# Altium PCB ADS1118_board.PcbDoc
Units mm, origin at the board's own origin, x right, y up, seen from the top; angles counter-clockwise.
Board outline 55.24 x 33.78 mm, 2 copper layers (Top Layer, Bottom Layer), stack 1.569 mm thick; 51 components, 33 nets, 144 pads, 152 vias.
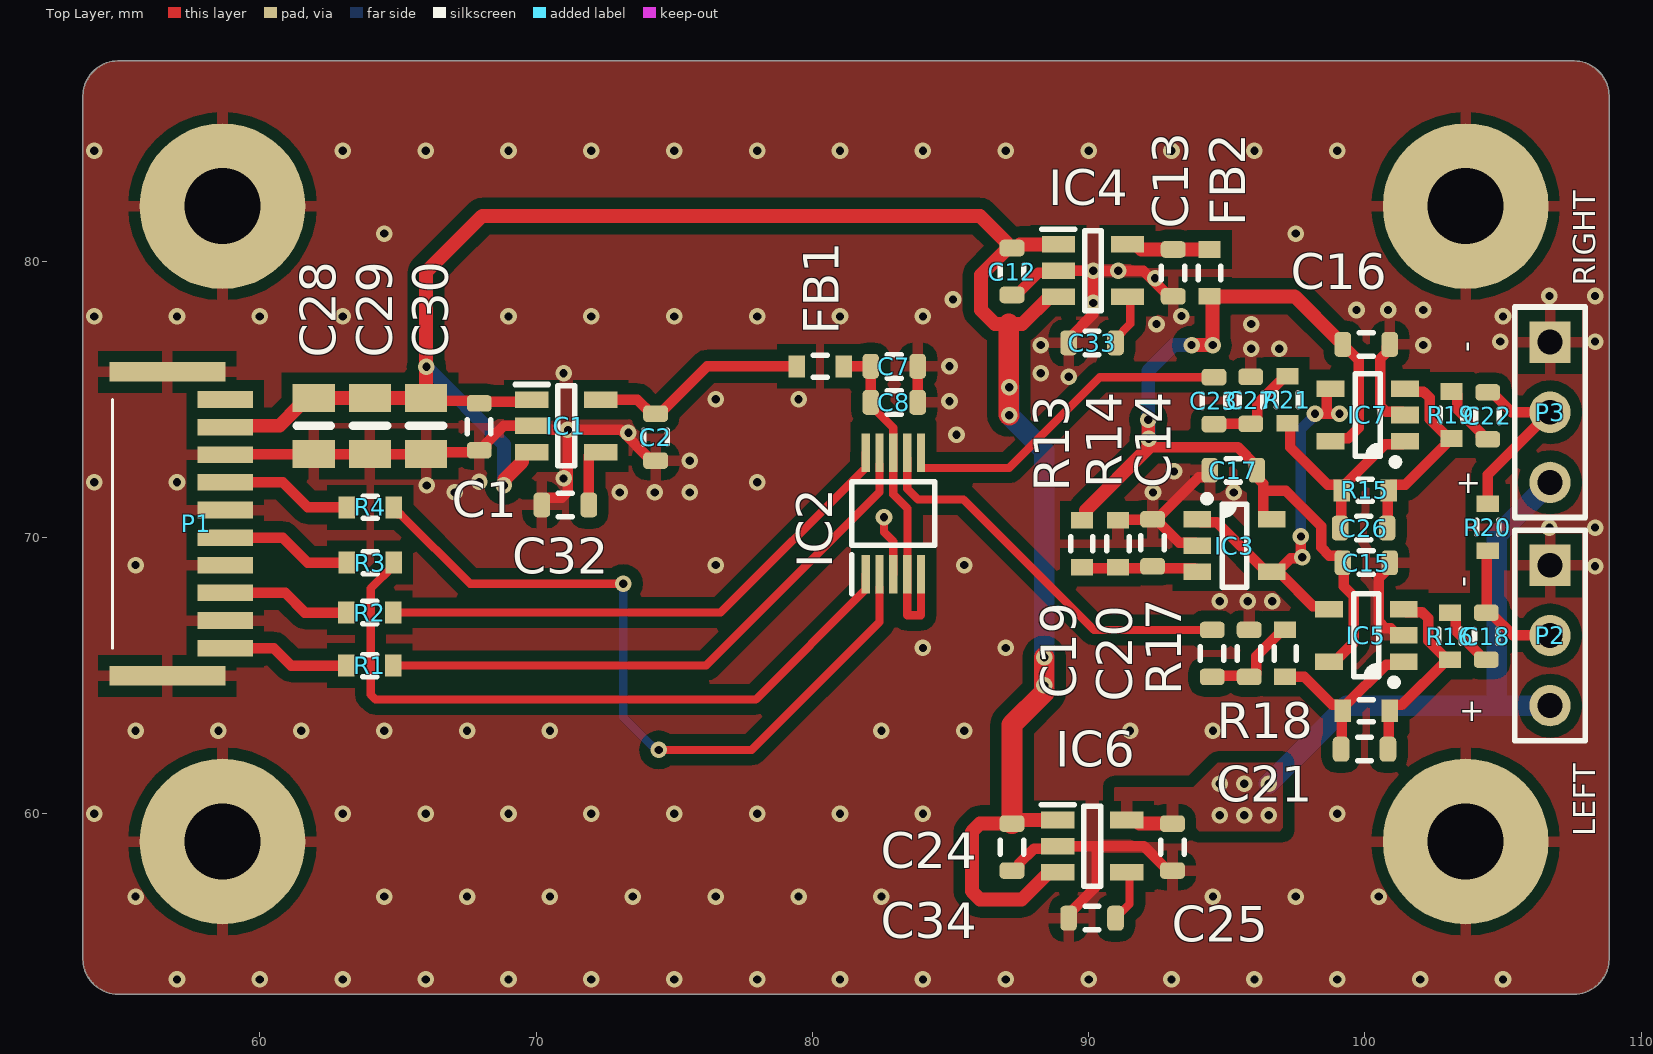
[diagram p0: Top Layer view]
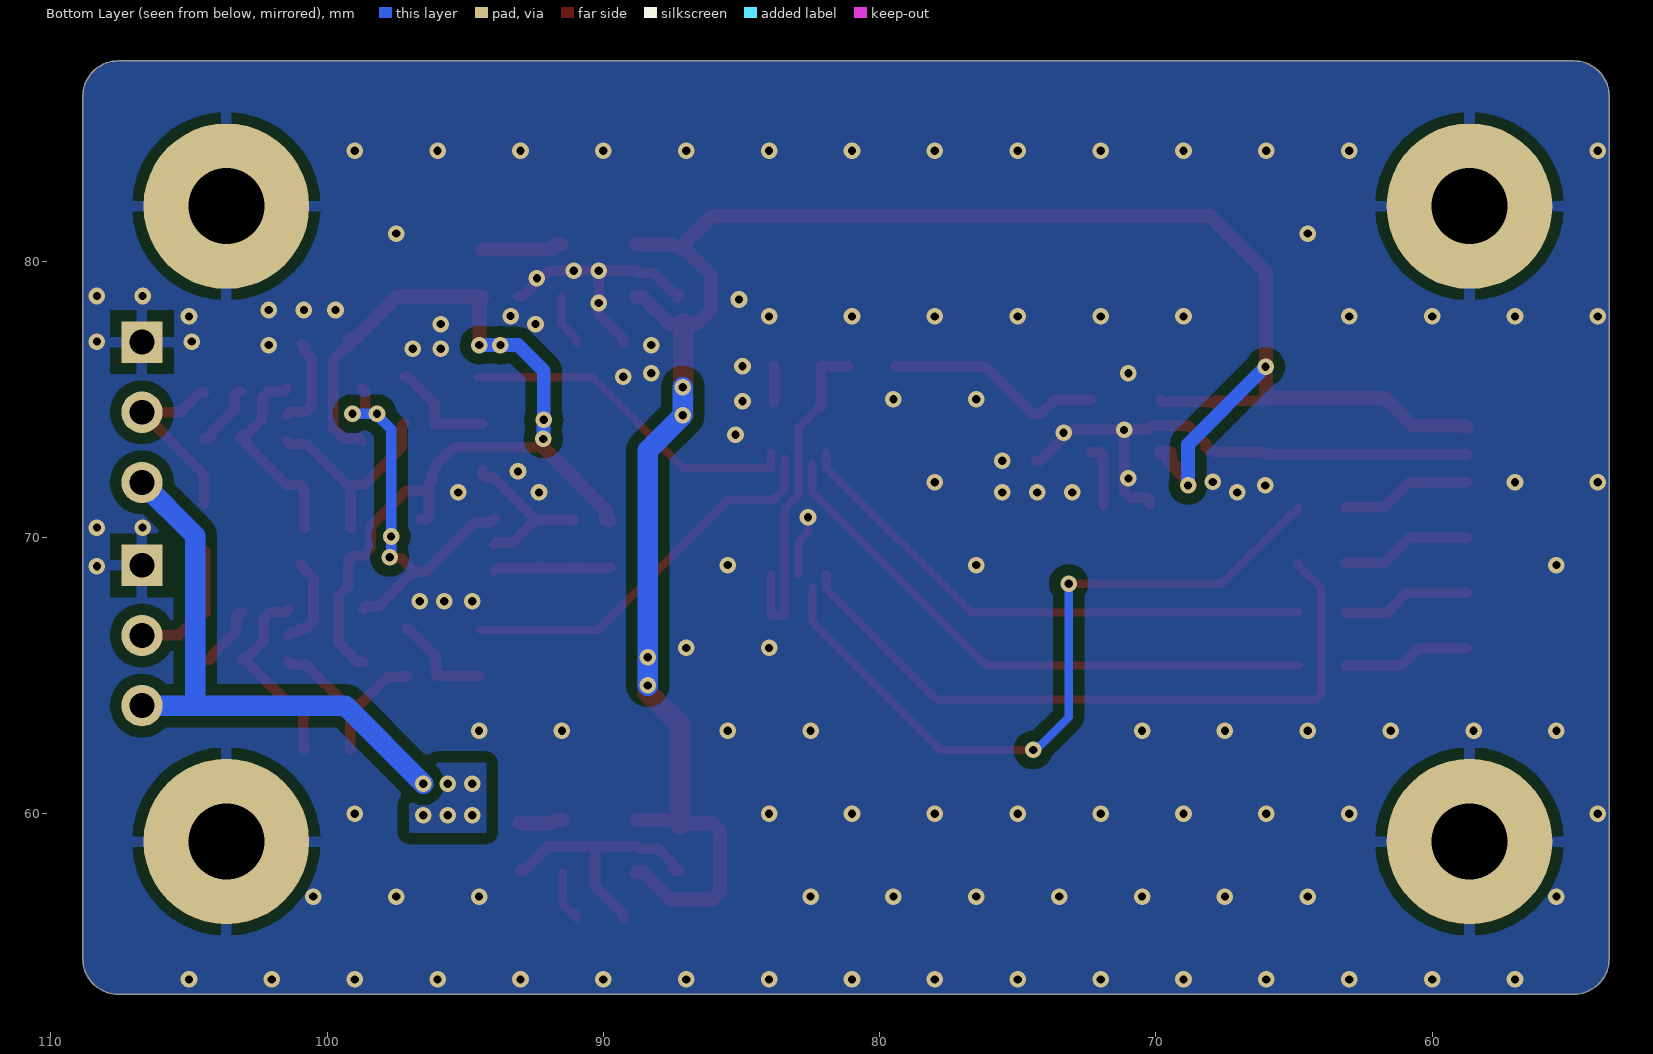
[diagram p1: Bottom Layer view, seen from below]
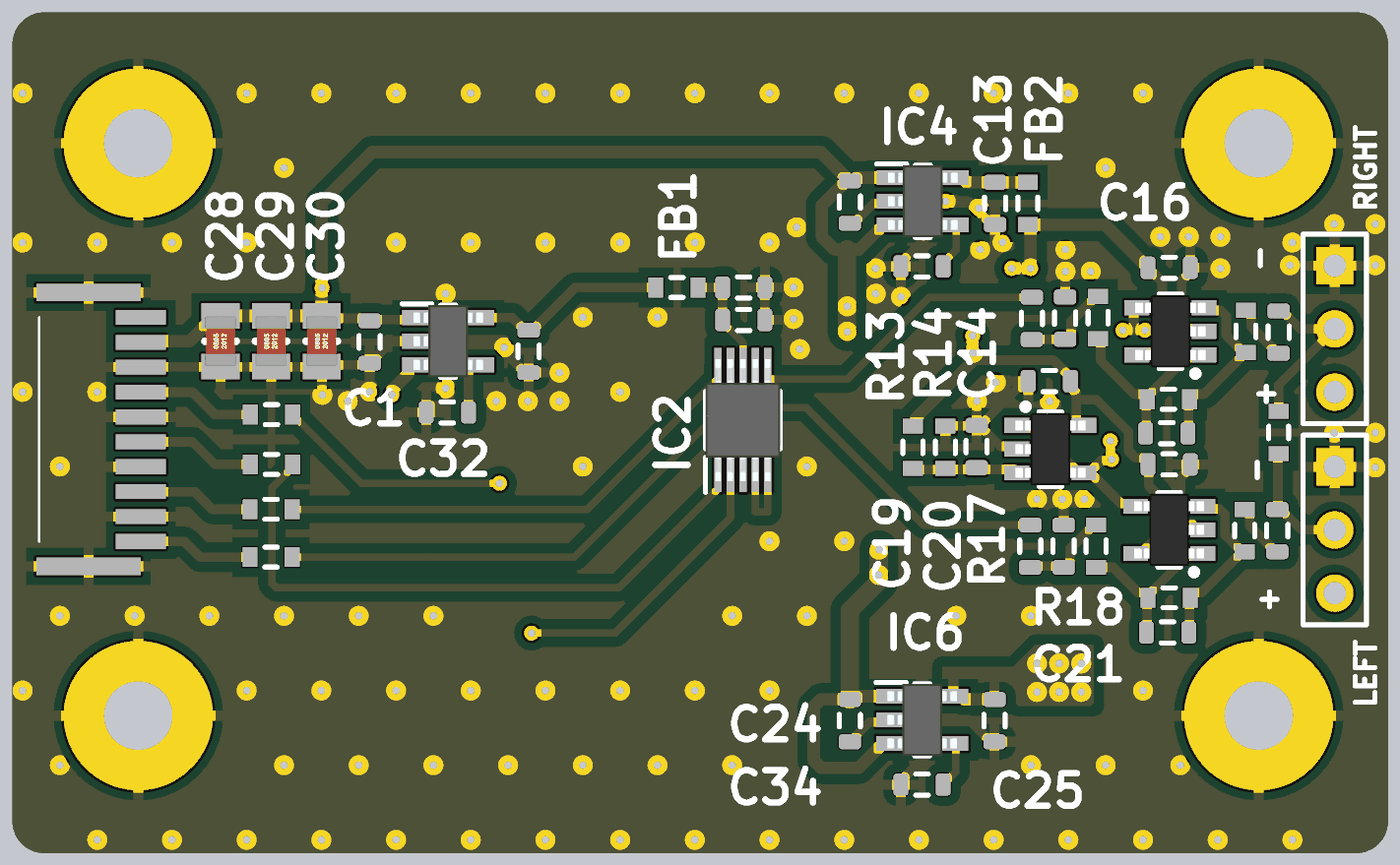
[diagram p2: 3D render of the assembled board from above, using the file's embedded part models]

## Layer stack, top to bottom
Top Solder: solder mask 0.0254, SM-001, Dk 4
Top Layer: signal copper 0.035
Dielectric 1: core 1.4986, Core-043, Dk 4.3
Bottom Layer: signal copper 0.035
Bottom Solder: solder mask 0.0254, SM-001, Dk 4

## Board outline
53.594,54.737 53.594,85.979 cw(c54.864,85.979) 54.864,87.249 107.569,87.249 cw(c107.569,85.979) 108.839,85.979 108.839,54.737 cw(c107.569,54.737) 107.569,53.467 54.864,53.467 cw(c54.864,54.737)

## Design rules (kind name [scope] priority, off if disabled: settings)
Clearance ClearancePol [InPoly] p1: gap=0.4 ignorepadtopadclearanceinfootprint=FALSE except(0: Arc-Hole Track-Hole SMDPad-Hole THPad-Hole Via-Hole Fill-Hole Poly-Hole Region-Hole Text-Hole)
Clearance Clearance_all [All] p2: gap=0.2 ignorepadtopadclearanceinfootprint=FALSE except(0: Arc-Hole Track-Hole SMDPad-Hole THPad-Hole Via-Hole Fill-Hole Poly-Hole Region-Hole Text-Hole)
ComponentClearance "Clearance Jumper" [(HasFootprint('Jumper NC') OR HasFootprint('Jumper NO'))] p1: gap=-0.5 collisioncheckmode=3 verticalgap=0.254 showdistances=FALSE
ComponentClearance "Clearance Coral" [(HasFootprint('Jumper NC') OR HasFootprint('Jumper NO'))] p2: gap=-0.5 collisioncheckmode=3 verticalgap=0.254 showdistances=FALSE
ComponentClearance "Clearance TEST" [(HasFootprint('test point 1mm'))] p3: gap=-0.5 collisioncheckmode=3 verticalgap=-0.5 showdistances=FALSE
ComponentClearance "Clearance PLS" [HasFootprint('PLS-1')] p4: gap=0 collisioncheckmode=3 verticalgap=0 showdistances=FALSE
ComponentClearance "Clearance PLS to PLS" [(HasFootprint('PLS-1 3D')) vs (HasFootprint('PLS-1 3D'))] p5: gap=-0.2 collisioncheckmode=3 verticalgap=0 showdistances=FALSE
ComponentClearance "Clearance PLS-4 to PLS-4" [(HasFootprint('PLS-4 3D')) vs (HasFootprint('PLS-4 3D'))] p6: gap=-0.2 collisioncheckmode=3 verticalgap=0 showdistances=FALSE
ComponentClearance [All] p7: gap=0.254 collisioncheckmode=3 verticalgap=0.254 showdistances=FALSE
DiffPairsRouting "DiffPairs USB" [(InNetClass('USB_HOST_1') OR InNetClass('USB_HOST_2') OR InNetClass('USB_HOST_3') OR InNetClass('USB_HOST_4'))] p1: maxlimit=0.2 minlimit=0.2 mostfreqgap=0.2 toplayer_minwidth=0.2 toplayer_maxwidth=0.2 toplayer_prefwidth=0.2 bottomlayer_minwidth=0.2 bottomlayer_maxwidth=0.2 bottomlayer_prefwidth=0.2 maxuncoupledlength=12.7
DiffPairsRouting "DiffPairs USB_CTRL" [InNetClass('USB_CTRL')] p2: maxlimit=0.2 minlimit=0.2 mostfreqgap=0.2 toplayer_minwidth=0.2 toplayer_maxwidth=0.2 toplayer_prefwidth=0.2 bottomlayer_minwidth=0.2 bottomlayer_maxwidth=0.2 bottomlayer_prefwidth=0.2 maxuncoupledlength=3
DiffPairsRouting "DiffPairs USB_CTRL_2" [InNetClass('USB_CTRL_2')] p3: maxlimit=0.2 minlimit=0.2 mostfreqgap=0.2 toplayer_minwidth=0.2 toplayer_maxwidth=0.2 toplayer_prefwidth=0.2 bottomlayer_minwidth=0.2 bottomlayer_maxwidth=0.2 bottomlayer_prefwidth=0.2 maxuncoupledlength=3
DiffPairsRouting [InNetClass('ETHERNET')] p4: maxlimit=0.2 minlimit=0.2 mostfreqgap=0.2 toplayer_minwidth=0.2 toplayer_maxwidth=0.2 toplayer_prefwidth=0.2 bottomlayer_minwidth=0.2 bottomlayer_maxwidth=0.2 bottomlayer_prefwidth=0.2 maxuncoupledlength=12.7
HoleSize [All] p1: absolutevalues=TRUE maxlimit=3.5 minlimit=0.025 maxpercent=80.000 minpercent=20.000
MatchedLengths USB2_RX [InNetClass('USB_CTRL_2')] p1: tolerance=0.2 checknetsindiffpair=TRUE checkdiffpairvsdiffpair=FALSE checkxsignals=FALSE checkothers=FALSE
MinimumSolderMaskSliver [All] p1: minsoldermaskwidth=0.01
PolygonConnect "Polygon to TEST PAD" [(HasFootprint('test point 1mm'))] p1: connectstyle=Direct reliefconductorwidth=0.254 reliefentries=4 polygonreliefangle="90 Angle" airgapwidth=0.254
PolygonConnect "Polygon to Battery" [HasFootprint('KEYS1042')] p2: connectstyle=Relief reliefconductorwidth=1 reliefentries=4 polygonreliefangle="90 Angle" airgapwidth=0.5
PolygonConnect "Polygon to VIA" [IsVia] p3: connectstyle=Direct reliefconductorwidth=0.254 reliefentries=4 polygonreliefangle="90 Angle" airgapwidth=0.254
PolygonConnect [All] p4: connectstyle=Relief reliefconductorwidth=0.4 reliefentries=4 polygonreliefangle="90 Angle" airgapwidth=0.4
RoutingVias [All] p1: holewidth=0.3 width=0.6 viastyle="Through Hole" minholewidth=0.3 minwidth=0.6 maxholewidth=0.3 maxwidth=0.6
SilkToSilkClearance [All] p1: silktosilkclearance=0.01
SilkToSolderMaskClearance [IsPad] p1: minsilkscreentomaskgap=0.01 clearancetoexposedcopper=TRUE
SolderMaskExpansion "SolderMask for VIA" [IsVia] p1: expansion=-0.5 istentingtop=FALSE
SolderMaskExpansion [All] p2: expansion=0.102 istentingtop=FALSE
ViasUnderSMD [All] p1: allowed=TRUE
Width "Width HSPEED ETH" [(InNetClass('ETH_RXD') OR InNetClass('ETH_TXD'))] p1: maxlimit=0.2 minlimit=0.2 preferedwidth=0.2
Width [All] p2: maxlimit=2 minlimit=0.2 preferedwidth=0.2
24 further rules are at their usual default settings.

## Classes and differential pairs
component class Analog: C12 C13 C14 C15 C16 C17 C18 C19 C20 C21 C22 C23 C24 C25 C26 C27 C33 C34 FB2 IC3 IC4 IC5 IC6 IC7 P2 P3 R13 R14 R15 R16 R17 R18 R19 R20 R21
component class ADC: C1 C2 C7 C8 C28 C29 C30 C32 FB1 IC1 IC2 P1 R1 R2 R3 R4

## Components (designator, comment, footprint, x,y, rotation, side; value= is the part's Value field where it differs from the comment)
C1 "10µF" "CAP 0603_1608"#1 67.909,74.036 r90 top
C2 "10µF" "CAP 0603_1608"#1 74.295,73.66 r90 top
C7 "1µF" "CAP 0603_1608"#1 82.931,76.164 r180 top
C8 "0.1µF" "CAP 0603_1608"#1 82.931,74.859 r180 top
C12 "10µF" "CAP 0603_1608"#1 87.196,79.658 r90 top
C13 "10µF" "CAP 0603_1608"#2 93.029,79.606 r90 top
C14 "0.1µF" "CAP 0603_1608"#2 92.346,69.773 r270 top
C15 "0.1µF" "CAP 0603_1608"#1 100.018,69.055 r180 top
C16 "0.1µF" "CAP 0603_1608"#1 100.018,76.956 r180 top
C17 "0.1µF" "CAP 0603_1608"#2 95.269,72.462 r0 top
C18 "10µF" "CAP 0603_1608"#1 104.362,66.457 r90 top
C19 "10 µF" "CAP 0603_1608"#1 94.442,65.833 r90 top
C20 "0.1µF" "CAP 0603_1608"#1 95.841,65.769 r270 top
C21 "10nF" "CAP 0603_1608"#1 100.018,62.365 r0 top
C22 "10µF" "CAP 0603_1608"#1 104.416,74.432 r90 top
C23 "10 µF" "CAP 0603_1608"#1 94.506,74.984 r90 top
C24 "10µF" "CAP 0603_1608"#1 87.196,58.823 r90 top
C25 "10µF" "CAP 0603_1608"#1 93.005,58.823 r90 top
C26 "10nF" "CAP 0603_1608"#1 99.986,70.368 r0 top
C27 "0.1µF" "CAP 0603_1608"#2 95.9,74.931 r270 top
C28 "10uF" SMD-0805C 61.95,74.036 r0 top
C29 "10uF" SMD-0805C 63.98,74.036 r0 top
C30 "10uF" SMD-0805C 66.016,74.036 r0 top
C32 "100nF" "CAP 0603_1608"#1 71.09,71.207 r0 top
C33 "100nF" "CAP 0603_1608"#2 90.155,77.071 r0 top
C34 "100nF" "CAP 0603_1608"#1 90.155,56.249 r0 top
FB1 "=Value" "FER 0603_1608"#1 80.28,76.194 r0 top
FB2 "=Value" "FER 0603_1608"#2 94.374,79.574 r90 top
IC1 "TPS76350DBVR" SOT95P280X145-5N 71.09,74.036 r0 top
IC2 "ADS1118IDGSR" SOP50P490X110-10N 82.931,70.866 r90 top
IC3 "AD8541ARTZ-REEL7" "ANALOG SOT-23-5 RJ-5" 95.281,69.702 r0 top
IC4 "TPS76350DBVR" SOT95P280X145-5N 90.155,79.658 r0 top
IC5 "AD8541ARTZ-REEL7" "ANALOG SOT-23-5 RJ-5" 100.05,66.457 r180 top
IC6 "TPS76350DBVR" SOT95P280X145-5N 90.131,58.823 r0 top
IC7 "AD8541ARTZ-REEL7" "ANALOG SOT-23-5 RJ-5" 100.103,74.432 r180 top
P1 "SFW10R-1STE9LF" SFW10R1STE9LF 57.147,70.492 r270 top
P2 "Header 3" HDR1X3 106.702,68.991 r270 top
P3 "Header 3" HDR1X3 106.702,77.071 r270 top
R1 "0 Ohms" "RES 0603_1608"#1 63.98,65.361 r0 top
R2 "0 Ohms" "RES 0603_1608"#1 63.98,67.282 r0 top
R3 "0 Ohms" "RES 0603_1608"#1 63.996,69.086 r0 top
R4 "0 Ohms" "RES 0603_1608"#1 63.996,71.086 r0 top
R13 "10k Ohms" "RES 0603_1608"#1 89.757,69.773 r90 top
R14 "10k Ohms" "RES 0603_1608"#2 91.062,69.773 r270 top
R15 "100k Ohms" "RES 0603_1608"#1 100.018,71.703 r0 top
R16 "100 Ohms" "RES 0603_1608"#1 103.081,66.425 r90 top
R17 "100 Ohms" "RES 0603_1608"#1 97.115,65.801 r270 top
R18 "100k Ohms" "RES 0603_1608"#1 100.05,63.728 r0 top
R19 "100 Ohms" "RES 0603_1608"#1 103.134,74.432 r90 top
R20 "0 Ohms" "RES 0603_1608"#1 104.446,70.368 r90 top
R21 "100 Ohms" "RES 0603_1608"#1 97.195,74.984 r270 top

## Footprints (in the part's own frame and the unit in brackets; to place one, negate y for a bottom-side part, rotate by r counter-clockwise, add the part's x,y. Pads: shape width x height; smd on the part's side, far side on the other; paste and mask are expansions set on the pad)
"ANALOG SOT-23-5 RJ-5" [mm] "SOT23, 5-Leads, Body 2.90x2.80mm, Pitch 0.95mm, IPC Medium Density"
  rect 1x0.6 smd: 1(-1.35,0.95) 2(-1.35,0) 3(-1.35,-0.95) 4(1.35,-0.95) 5(1.35,0.95)
  silkscreen extent -1.12,-1.5 0.45,1.82, body extent -1.41,-1.45 1.41,1.45, height 1.5
"CAP 0603_1608"#1 [mm] "Chip Capacitor, 2-Leads, Body 1.60x0.80mm, IPC Medium Density"
  rrect50% 0.6x0.9 smd mask+0.05: 1(-0.882,-0.03) 2(0.818,-0.03)
  silkscreen extent -0.28,-0.46 0.22,0.39, body extent -0.83,-0.43 0.77,0.37, height 0.8
"CAP 0603_1608"#2 [mm] "Chip Capacitor, 2-Leads, Body 1.60x0.80mm, IPC Medium Density"
  rrect50% 0.6x0.9 smd: 1(-0.882,-0.03) 2(0.818,-0.03)
  silkscreen extent -0.28,-0.46 0.22,0.39, body extent -0.83,-0.43 0.77,0.37, height 0.8
"FER 0603_1608"#1 [mm] "Chip Ferrite, 2-Leads, Body 1.60x0.80mm, IPC Medium Density"
  rect 0.6x0.8 smd mask+0.05: 1(-0.85,0) 2(0.85,0)
  silkscreen extent -0.25,-0.4 0.25,0.4, body extent -0.77,-0.42 0.78,0.43, height 0.45
"FER 0603_1608"#2 [mm] "Chip Ferrite, 2-Leads, Body 1.60x0.80mm, IPC Medium Density"
  rect 0.6x0.8 smd: 1(-0.85,0) 2(0.85,0)
  silkscreen extent -0.25,-0.4 0.25,0.4, body extent -0.77,-0.42 0.78,0.43, height 0.45
HDR1X3 [mm] "Connector; Header; 3 Position"
  rect 1.5x1.5 hole 0.9: 1(0,0)
  round 1.5 hole 0.9: 2(2.54,0) 3(5.08,0)
  silkscreen extent -1.27,-1.27 6.35,1.27
"RES 0603_1608"#1 [mm] "Chip Resistor, 2-Leads, Body 1.60x0.80mm, IPC Medium Density"
  rect 0.6x0.8 smd mask+0.05: 1(-0.85,0) 2(0.85,0)
  silkscreen extent -0.25,-0.4 0.25,0.4, body extent -0.77,-0.42 0.78,0.43, height 0.45
"RES 0603_1608"#2 [mm] "Chip Resistor, 2-Leads, Body 1.60x0.80mm, IPC Medium Density"
  rect 0.6x0.8 smd: 1(-0.85,0) 2(0.85,0)
  silkscreen extent -0.25,-0.4 0.25,0.4, body extent -0.77,-0.42 0.78,0.43, height 0.45
SFW10R1STE9LF [mm]
  rect 0.6x2 smd: 1(-4.5,1.6) 2(-3.5,1.6) 3(-2.5,1.6) 4(-1.5,1.6) 5(-0.5,1.6) 6(0.5,1.6) 7(1.5,1.6) 8(2.5,1.6) 9(3.5,1.6) 10(4.5,1.6)
  rect 0.7x4.2 smd: MP1(-5.5,-0.5) MP2(5.5,-0.5)
  silkscreen extent -4.5,-2.48 4.5,-2.48
SMD-0805C [mil]
  rect 60x40 smd: 1(0,40) 2(0,-40)
  silkscreen extent -25,0 25,0, body extent -25,-39 25,39, height 35
SOP50P490X110-10N [mm]
  rect 1.4x0.3 smd: 1(-2.2,1) 2(-2.2,0.5) 3(-2.2,0) 4(-2.2,-0.5) 5(-2.2,-1) 6(2.2,-1) 7(2.2,-0.5) 8(2.2,0) 9(2.2,0.5) 10(2.2,1)
  silkscreen extent -2.9,-1.5 1.15,1.5, body extent -2.45,-1.5 2.45,1.5, height 1.1
SOT95P280X145-5N [mm]
  rect 1.2x0.6 smd: 1(-1.25,0.95) 2(-1.25,0) 3(-1.25,-0.95) 4(1.25,-0.95) 5(1.25,0.95)
  silkscreen extent -1.85,-1.45 0.3,1.5, body extent -1.4,-1.45 1.4,1.45, height 1.45

## Part data
C1 C2 C7 C8 C12 C13 C14 C15 C16 C17 C18 C19 C20 C21 C22 C23 C24 C25 C26 C27 C32 C33 C34: library part 100X14W104MV4T, "CAP CER 0.1UF 10V X7R 0603", Part Number=100X14W104MV4T
C28 C29 C30: library part GRJ21BR71A106KE01L, "CAP CER 10UF 10V X7R 0805", Digi-Key Part Number=490-10919-1-ND, Manufacturer="Murata Electronics North America", Operating Temperature="-55°C ~ 125°C", Package / Case="0805 (2012 Metric)", Ratings=-, Temperature Coefficient=X7R, Tolerance=±10%, Voltage=10V, @ qty=0, Applications="Boardflex Sensitive", Datasheets=http://www.murata.com/~/media/webrenewal/support/library/catalog/products/capacitor/mlcc/c02e.pdf, Factory Stock=0, Features="Soft Termination", Height - Seated (Max)=-, Image=//media.digikey.com/Renders/Murata%20Renders/0805%20(2012%20Metric)%20.85mm.jpg, Lead Spacing=-, Lead Style=-, Minimum Quantity=1, Mounting Type="Surface Mount, MLCC", Packaging="Cut Tape (CT)", Part Number=GRJ21BR71A106KE01L, Part Status=Active, Quantity Available=6658, Series=GRJ, Size / Dimension="0.079\" L x 0.049\" W (2.00mm x 1.25mm)", Thickness (Max)="0.057\" (1.45mm)", Unit Price (USD)=0,69
FB1 FB2: library part 2506031217H0, "FERRITE BEAD 0603 1LN", Part Number=2506031217H0
IC1 IC4 IC6: "Integrated Circuit", Manufacturer_Name="Texas Instruments", Mouser Part Number=595-TPS76350DBVR, Arrow Part Number=TPS76350DBVR, Arrow Price/Stock=https://www.arrow.com/en/products/tps76350dbvr/texas-instruments, Datasheet Link=https://www.ti.com/lit/gpn/TPS763, Height=1.45mm, Manufacturer_Part_Number=TPS76350DBVR, Mouser Price/Stock=https://www.mouser.co.uk/ProductDetail/Texas-Instruments/TPS76350DBVR?qs=8yeEWhuAOtMYKUfRRdAKSw%3D%3D
IC2: "Integrated Circuit", Manufacturer_Name="Texas Instruments", Mouser Part Number=595-ADS1118IDGSR, Arrow Part Number=ADS1118IDGSR, Arrow Price/Stock=https://www.arrow.com/en/products/ads1118idgsr/texas-instruments?region=nac, Datasheet Link=http://www.ti.com/lit/gpn/ads1118, Height=1.1mm, Manufacturer_Part_Number=ADS1118IDGSR, Mouser Price/Stock=https://www.mouser.co.uk/ProductDetail/Texas-Instruments/ADS1118IDGSR?qs=g5raLcSarOb4n6jVZI8bUw%3D%3D
IC3 IC5 IC7: "IC OPAMP GP 1 CIRCUIT SOT23-5", Current - Input Bias=4pA, Current - Output / Channel=30mA, Current - Supply=45µA, Device Package="SC-74A, SOT-753", Manufacturer="Analog Devices Inc.", Operating Temperature="-40°C ~ 125°C", Supplier Device Package=SOT-23-5, Supplier Part Number 1=AD8541ARTZ-REEL7CT-ND, Voltage - Input Offset=1mV, Voltage - Supply, Single/Dual (±)="2.7V ~ 5.5V", Amplifier Type="General Purpose", ComponentLink1Description=Datasheet, ComponentLink1URL=https://www.analog.com/media/en/technical-documentation/data-sheets/AD8541_8542_8544.pdf, ComponentLink2Description="DigiKey Link", ComponentLink2URL=http://digikey.com/product-detail/en/analog-devices-inc/AD8541ARTZ-REEL7/AD8541ARTZ-REEL7CT-ND/813416, Gain Bandwidth Product=1MHz, LastUpdated="08.01.2020 23:39:15", Lifecycle Status=Active, Minimum Order=1, Mounting Type="Surface Mount", Number of Circuits=1, Output Type=Rail-to-Rail, Package / Case="SC-74A, SOT-753", Packaging=ReReel, Part Number=AD8541ARTZ-REEL7, Part Status=Active, PartId=9, Price=0.00, Series=-, Slew Rate=0.92V/µs, Supplier 1=DigiKey
P1: "Connector", Manufacturer_Name=Amphenol, Mouser Part Number=649-SFW10R-1STE9LF, Datasheet Link=http://uk.rs-online.com/web/p/products/1708742, Height=2.7mm, Manufacturer_Part_Number=SFW10R-1STE9LF, Mouser Price/Stock=https://www.mouser.co.uk/ProductDetail/Amphenol-FCI/SFW10R-1STE9LF/?qs=0%2FIPJkn5eAy46aTtkIWKXg%3D%3D
P2 P3: "Header, 3-Pin", LatestRevisionDate=17-Jul-2002, LatestRevisionNote="Re-released for DXP Platform.", Publisher="Altium Limited"
R1 R2 R3 R4 R13 R14 R15 R16 R17 R18 R19 R20 R21: library part RNCS0603BKE100R, "RES 100 OHM 0.1% 1/16W 0603", Part Number=RNCS0603BKE100R

## Free pads (board coordinates)
  round 6 hole 2.75: ""(58.647,58.991) ""(58.647,81.991) ""(103.647,58.991) ""(103.647,81.991)

## Via types
v1: diameter 0.6, hole 0.3, Top Layer to Bottom Layer, 152 vias

## Nets (pads, with @x,y where several pads share a name; then routed paths per layer and width w, separated by ;. In a path a pad name is that pad's centre, name@x,y a point inside that pad or via, vN(x,y) a via of type N, cw(c..) or ccw(c..) an arc to the next point about the centre after c; other vN are vias at no path point)
+3V3: C2.2 FB1.1 IC1.5 | length 8
  Top Layer w0.381: IC1.5 73.667,74.986 74.175,74.478 C2.2 74.475,74.478 76.191,76.194 FB1.1
+3V3_EXT: P1.1
+3VA: C13.2 FB2.2 IC4.5 | length 2.9
  Top Layer w0.5: IC4.5@91.505,80.608 91.73,80.608 91.915,80.424 C13.2 FB2.2
+AVCC: C15.2 C16.2 C17.2 FB2.1 IC3.5 IC5.5 IC7.5 R13.2 | length 37.8
  Top Layer w0.381: 92.156,73.233 92.195,73.272 95.396,73.272 96.087,72.581 C17.2 96.196,72.322 96.196,72.073 96.325,71.945 96.325,71.683 ; IC3.5 96.434,70.652 96.325,70.762 96.325,71.683 ; IC5.5 98.9,65.507 99.59,66.197 99.59,67.869 99.232,68.227 99.232,69.053 C15.2 99.2,69.235 99.09,69.344 98.71,69.344 98.413,69.641 98.413,70.407 97.137,71.683 96.325,71.683 ; IC7.5 98.863,73.592 99.4,73.592 99.772,73.964 99.772,76.414 C16.2
  Top Layer w0.5: R13.2 89.857,70.623 89.907,70.673 89.907,70.984 92.156,73.233 92.156,73.566 v1(92.156,74.261) ; v1(93.726,76.962) v1(94.488,76.962) 94.488,78.609 FB2.1 97.462,78.724 99,77.186 99.15,77.186 99.2,77.136 C16.2
  Bottom Layer w0.5: v1(92.172,73.566) 92.164,73.574 92.164,74.253 v1(92.156,74.261) 92.156,76.027 93.091,76.962 v1(93.726,76.962) v1(94.488,76.962)
+V_EXT: C1.2 C12.2 C24.2 C28.1 C29.1 C30.1 IC1.1 IC1.3 IC4.1 IC4.3 IC6.1 IC6.3 P1.2 | length 83.4
  Top Layer w0.381: C30.1 66.115,74.953 67.84,74.953 C1.2 67.991,74.906 69.76,74.906 IC1.1
  Top Layer w0.5: P1.2 58.797,74.042 60.707,74.042 61.438,74.773 61.438,74.794 61.696,75.052 C29.1 C30.1 v1@66.016,76.178 ; v1(66.027,76.178) v1@66.016,76.178 ; v1(68.834,71.882) 68.853,71.901 68.853,72.099 69.49,72.736 69.49,73.036 69.54,73.086 IC1.3 ; C12.2 C12.2@87.076,80.476 ; C12.2@87.509,80.608 IC4.1@88.805,80.608 ; IC6.3@88.781,57.873 88.556,57.873 87.579,56.896 86.069,56.896 85.776,57.189 85.776,59.348 86.069,59.641 C24.2 87.376,59.641 87.509,59.773 IC6.1@88.781,59.773 ; IC4.3@88.805,78.708 88.58,78.708 87.596,77.724 87.105,77.724 86.614,77.724 86.106,78.232 86.106,79.506 C12.2@87.076,80.476 ; v1@66.016,76.178 66.016,77.329 66.016,79.605 66.924,80.513 68.047,81.636 86.066,81.636 87.026,80.676 87.026,80.526 C12.2@87.076,80.476
  Top Layer w0.75: 87.105,77.724 87.108,77.721 87.108,75.438 87.108,74.436 v1(87.126,74.418) ; C24.2 87.226,63.223 88.392,64.389 v1(88.392,64.643) v1(88.392,65.659)
  Bottom Layer w0.5: v1(66.027,76.178) 68.834,73.371 v1(68.834,71.882)
  Bottom Layer w0.75: v1(87.122,75.438) 87.122,74.422 v1(87.126,74.418) 88.392,73.152 v1(88.392,65.659) v1(88.392,64.643)
+V_OUT: C25.2 IC6.5 P2.3 P3.3 | length 21.8
  Top Layer w0.5: IC6.5@91.481,59.773 91.706,59.773 91.838,59.641 C25.2
  Bottom Layer w0.75: v1(96.52,61.087) 99.344,63.911 104.775,63.911 ; P2.3 104.775,63.911 ; P3.3 104.775,70.064 104.775,63.911
  other v1: 94.742,59.944 95.631,59.944 96.52,59.944 94.742,61.087 95.631,61.087
+VREF: IC3.1 IC3.4 IC5.4 IC7.4 | length 16.1
  Top Layer w0.381: IC3.1@93.931,70.697 94.084,70.543 94.64,70.543 IC3.4@96.431,68.752 ; IC3.4 96.831,68.752 97.32,69.242 97.649,69.242 97.695,69.242 v1(97.737,69.283) 97.737,69.343 97.685,69.395 v1(97.685,70.032) ; IC3.4@96.781,68.802 96.94,68.643 96.992,68.643 98.119,67.516 98.59,67.516 IC5.4 ; v1(98.193,74.477) 98.624,74.477 ; IC7.4 98.733,75.382 98.624,75.273 98.624,74.477 ; v1(99.082,74.477) 98.624,74.477
  Bottom Layer w0.381: v1(97.737,69.283) 97.737,69.343 97.685,69.395 97.685,73.91 98.193,74.418 v1(98.193,74.477) v1(99.082,74.477)
ADC_LEFT: C19.2 IC2.7 | length 14.3
  Top Layer w0.3: IC2.7@83.431,72.861 83.431,71.763 83.82,71.374 85.471,71.374 90.194,66.651 C19.2
ADC_RIGHT: C23.2 IC2.6 | length 12.5
  Top Layer w0.3: IC2.6 83.931,72.517 87.122,72.517 90.407,75.802 C23.2
GND: C1.1 C2.1 C7.1 C8.1 C12.1 C13.1 C14.1 C15.1 C16.1 C17.1 C20.1 C24.1 C25.1 C27.1 C28.2 C29.2 C30.2 C32.1 C33.1 C34.1 IC1.2 IC2.3 IC3.2 IC4.2 IC5.2 IC6.2 IC7.2 P1.3 P1.5 P1.7 P1.9 P1.MP1 P1.MP2 P2.1 P3.1 pad. R14.1 | length 55.7
  Top Layer w0.3: v1(82.591,70.731) 82.591,70.19 82.931,69.85 IC2.3
  Top Layer w0.381: P1.3 58.761,73.006 66.001,73.006 C30.2 66.083,73.087 67.872,73.087 C1.1 68.089,73.154 68.198,73.264 68.198,73.414 68.821,74.036 70.14,74.036 70.25,73.927 70.438,73.927 70.473,73.892 v1(71.149,73.892) ; C32.1 70.208,71.327 70.318,71.436 70.926,71.436 71.149,71.66 v1(71.149,73.892) ; C2.1 74.175,72.778 73.061,73.892 v1(71.149,73.892) ; C8.1 C7.1 ; C24.1 87.376,57.941 87.486,58.05 87.486,58.2 88.024,58.738 88.696,58.738 88.781,58.823 90.296,58.823 ; C12.1@87.32,78.683 C12.1 87.376,78.776 88.174,79.574 88.721,79.574 88.805,79.658 v1(90.17,79.658) ; C34.1 89.273,56.368 90.296,57.391 90.296,58.823 ; C33.1 89.273,77.191 90.17,78.088 v1(90.17,79.658) ; R14.1 91.078,70.639 92.3,70.639 C14.1 C14.1@92.466,70.655 ; C25.1 92.885,57.941 92.003,58.823 90.296,58.823 ; C13.1 92.909,78.724 91.975,79.658 v1(90.17,79.658) ; IC3.2@93.931,69.747 93.865,69.812 93.274,69.812 92.575,70.51 92.575,70.545 C14.1@92.466,70.655 ; C17.1 94.387,72.281 94.277,72.172 93.983,72.172 C14.1@92.466,70.655 ; C16.1 100.79,76.877 100.79,76.707 100.552,76.468 100.552,74.765 100.775,74.542 101.344,74.542 IC7.2 ; C15.1@100.932,69.011 100.932,68.967 100.509,68.544 100.509,66.945 100.738,66.716 100.94,66.716 101.09,66.566 101.29,66.566 IC5.2
  other v1: 57,54 60,54 63,54 66,54 69,54 72,54 75,54 78,54 81,54 84,54 87,54 90,54 93,54 96,54 99,54 102,54 105,54 55.5,57 64.5,57 67.5,57 70.5,57 73.5,57 76.5,57 79.5,57 82.5,57 94.5,57 97.5,57 100.5,57 54,60 63,60 66,60 69,60 72,60 75,60 78,60 81,60 84,60 99,60 55.5,63 58.5,63 61.5,63 64.5,63 67.5,63 70.5,63 82.5,63 85.5,63 91.5,63 94.5,63 84,66 87,66 94.742,67.691 95.758,67.691 96.647,67.691 108.331,68.961 55.5,69 76.5,69 85.5,69 106.68,70.358 108.331,70.358 67.056,71.628 73.025,71.628 74.295,71.628 75.565,71.628 92.329,71.628 95.25,71.628 66.04,71.882 54,72 57,72 67.945,72.009 78,72 70.993,72.136 93.091,72.39 75.565,72.771 85.217,73.716 73.34,73.786 84.963,74.93 76.5,75 79.5,75 89.281,75.819 70.993,75.946 88.265,75.946 84.963,76.2 95.885,76.835 96.901,76.835 88.265,76.962 102.108,76.962 104.902,77.089 108.331,77.089 92.456,77.724 95.885,77.724 54,78 57,78 60,78 63,78 69,78 72,78 75,78 78,78 81,78 84,78 93.359,78.013 105,78 99.695,78.232 100.838,78.232 102.108,78.232 90.17,78.486 85.09,78.613 106.68,78.74 108.331,78.74 92.405,79.383 91.072,79.658 64.5,81 97.5,81 54,84 63,84 66,84 69,84 72,84 75,84 78,84 81,84 84,84 87,84 90,84 93,84 96,84 99,84
NetC7_2: C7.2 C8.2 FB1.2 IC2.4 IC2.5 IC2.8 | length 12.6
  Top Layer w0.3: C8.2@82.16,74.74 82.931,73.968 IC2.8 82.931,71.556 83.439,71.048 83.439,69.312 83.431,69.304 IC2.4 83.431,67.183 83.931,67.183 IC2.5
  Top Layer w0.381: FB1.2 C7.2 C8.2 82.113,74.74 C8.2@82.16,74.74
NetC14_2: C14.2 IC3.3 R13.1 R14.2 | length 4.3
  Top Layer w0.381: R13.1 89.799,68.88 91.02,68.88 R14.2 91.1,68.885 92.246,68.885 C14.2 92.386,68.885 93.842,68.885 IC3.3@93.931,68.797
NetC18_1: C18.1 R16.2 | length 2.4
  Top Layer w0.381: R16.2 103.177,67.275 103.287,67.165 103.287,66.621 104.133,65.775 104.133,65.684 104.243,65.575 C18.1
NetC18_2: C18.2 P2.2 R20.1 | length 4.9
  Top Layer w0.381: R20.1 104.419,69.492 104.419,67.301 C18.2 104.543,67.275 105.361,66.457 P2.2@106.648,66.457
NetC19_1: C19.1 C20.2 R17.1 | length 3.7
  Top Layer w0.381: C19.1@94.472,64.996 96.005,64.996 96.07,65.061 96.07,65.696 96.905,66.532 96.905,66.542 97.059,66.696 R17.1@97.115,66.696
NetC21_1: C21.1 IC5.1 R17.2 R18.1 | length 7.1
  Top Layer w0.381: R17.2 97.797,64.951 98.812,63.937 R18.1@99.309,63.937 ; R17.2@97.115,64.996 R17.2@97.215,64.996 ; C21.1 99.168,62.367 99.168,63.696 R18.1 99.2,63.828 R18.1@99.309,63.937 ; IC5.1 101.29,65.397 100.77,65.397 R18.1@99.309,63.937
NetC21_2: C21.2 IC5.3 R16.1 R18.2 | length 7.2
  Top Layer w0.381: C21.2 100.868,62.367 100.868,63.696 R18.2 100.9,63.828 101.009,63.937 101.343,63.937 R16.1@102.981,65.575 ; IC5.3 101.509,67.297 102.067,67.297 102.29,67.074 102.29,66.265 R16.1@102.981,65.575 ; R16.1 R16.1@102.981,65.575
NetC22_1: C22.1 R19.2 | length 2.4
  Top Layer w0.381: R19.2 103.234,75.282 103.344,75.173 103.344,74.637 104.186,73.794 104.186,73.659 104.296,73.55 C22.1
NetC22_2: C22.2 P3.2 R20.2 | length 6.8
  Top Layer w0.381: R20.2 104.446,72.275 P3.2 105.315,74.531 104.596,75.25 C22.2
NetC23_1: C23.1 C27.2 R21.1 | length 4
  Top Layer w0.381: C23.1@94.383,74.113 96.111,74.113 96.111,74.84 96.711,75.439 96.711,75.441 96.986,75.716 96.986,75.725 97.095,75.834 R21.1
NetC26_1: C26.1 IC7.1 R15.1 R21.2 | length 7.7
  Top Layer w0.381: R21.2 97.298,74.031 97.298,73.263 98.649,71.912 99.058,71.912 99.168,71.803 R15.1 99.136,71.671 99.136,70.37 C26.1 ; R15.1@99.277,71.912 100.738,73.373 101.344,73.373 IC7.1
NetC26_2: C26.2 IC7.3 R15.2 R19.1 | length 7.4
  Top Layer w0.381: C26.2 100.836,70.37 100.836,71.671 R15.2 100.868,71.803 100.977,71.912 101.465,71.912 102.925,73.373 102.925,73.473 103.034,73.582 R19.1 103.025,73.692 102.925,73.692 102.344,74.273 102.344,75.049 102.121,75.273 101.563,75.273 IC7.3
NetC32_2: C32.2 IC1.4 | length 2.3
  Top Layer w0.381: C32.2 71.908,72.954 72.04,73.086 IC1.4
NetC33_2: C33.2 IC4.4 | length 1.9
  Top Layer w0.3: C33.2 90.973,77.191 91.505,77.723 IC4.4@91.505,78.708
NetC34_2: C34.2 IC6.4 | length 2
  Top Layer w0.3: C34.2 90.973,56.368 91.023,56.418 91.173,56.418 91.481,56.726 IC6.4@91.481,57.873
NetIC2_1: IC2.1 R3.2 | length 25.3
  Top Layer w0.3: R3.2 64.846,68.986 64.008,68.148 64.008,64.311 64.184,64.135 77.95,64.135 81.931,68.116 IC2.1
NetIC2_2: IC2.2 R4.2 | length 27.3
  Top Layer w0.3: R4.2 64.846,70.986 64.996,70.836 65.096,70.836 67.606,68.326 v1(73.152,68.326) ; v1(74.443,62.307) 77.801,62.307 82.431,66.937 IC2.2@82.431,68.199
  Bottom Layer w0.3: v1(73.152,68.326) 73.152,63.5 74.195,62.457 74.212,62.457 74.362,62.307 v1(74.443,62.307)
NetIC2_9: IC2.9 R1.2 | length 21.2
  Top Layer w0.3: R1.2 76.156,65.361 82.431,71.636 IC2.9@82.431,72.644
NetIC2_10: IC2.10 R2.2 | length 19.8
  Top Layer w0.3: R2.2 76.68,67.282 81.914,72.516 81.931,72.516 IC2.10
SPI0_CS: P1.4 R4.1 | length 4.8
  Top Layer w0.381: P1.4 60.826,71.992 61.732,71.086 R4.1
SPI0_MISO: P1.10 R1.1 | length 4.6
  Top Layer w0.381: P1.10 60.5,65.992 61.131,65.361 R1.1
SPI0_MOSI: P1.8 R2.1 | length 4.7
  Top Layer w0.381: P1.8 60.916,67.992 61.626,67.282 R2.1
SPI0_SCK: P1.6 R3.1 | length 4.8
  Top Layer w0.381: P1.6 60.826,69.992 61.732,69.086 R3.1

## Polygon pours and split planes (outlines as drawn)
GND on Bottom Layer "NONET_L-01_P-001" (solid, pour order 3): 53.594,85.979 cw(c54.864,85.979) 54.864,87.249 107.569,87.249 cw(c107.569,85.979) 108.839,85.979 108.839,54.737 cw(c107.569,54.737) 107.569,53.467 54.864,53.467 cw(c54.864,54.737) 53.594,54.737
+V_OUT on Bottom Layer "NONET_L-01_P-001" (solid, pour order 1): 97.028,61.849 97.028,59.309 94.234,59.309 94.234,61.849
GND on Top Layer "NONET_L-01_P-001" (solid, pour order 2): 53.594,85.979 cw(c54.864,85.979) 54.864,87.249 107.569,87.249 cw(c107.569,85.979) 108.839,85.979 108.839,54.737 cw(c107.569,54.737) 107.569,53.467 54.864,53.467 cw(c54.864,54.737) 53.594,54.737
+V_OUT on Top Layer "NONET_L-01_P-001" (solid, pour order 0): 94.678,61.849 93.789,60.96 90.932,60.96 90.932,59.372 90.995,59.372 97.028,59.372 97.028,61.849

## Silkscreen, mask and mechanical layers (free items; w line width, h text height)
Top Overlay:
  text "RIGHT" at 108.331,79.106 h0.8 r90
  text "-" at 104.032,76.708 h0.8 r90
  text "+" at 103.291,71.602 h0.8
  text "-" at 103.905,68.199 h0.8 r90
  text "+" at 103.418,63.347 h0.8
  text "LEFT" at 108.331,59.182 h0.8 r90
Mechanical 6:
  lines w0.2: 53.594,54.737 ccw(c54.864,54.737) 54.864,53.467 107.569,53.467 ccw(c107.569,54.737) 108.839,54.737 108.839,85.979 ccw(c107.569,85.979) 107.569,87.249 54.864,87.249 ccw(c54.864,85.979) 53.594,85.979 53.594,85.852 53.594,74.168 53.594,54.737